# Altium PCB bms_schematic.PcbDoc
Units mil, origin at the board's own origin, x right, y up, seen from the top; angles counter-clockwise.
Board outline 6000 x 4000 mil, 2 copper layers (Top Layer, Bottom Layer); 49 components, 35 nets, 163 pads, 4 vias.
Unrouted connection lines stored in the file: 89.
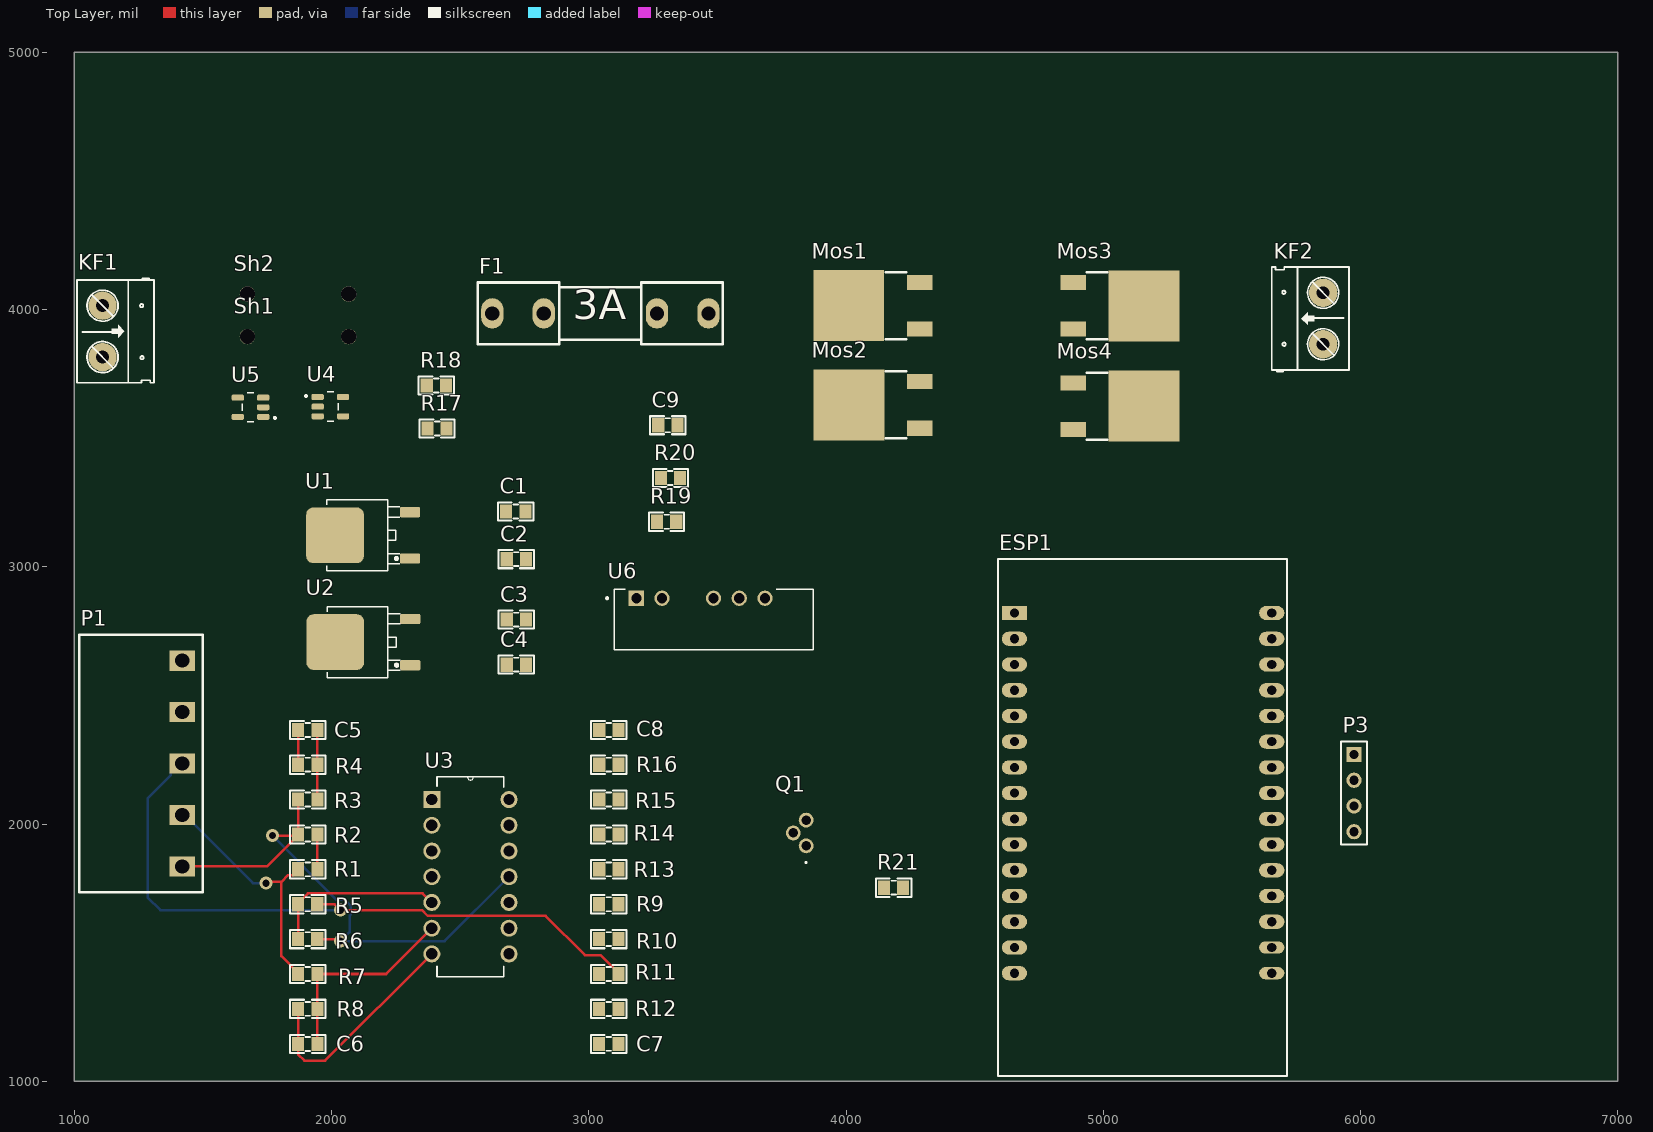
[diagram p0: Top Layer view]
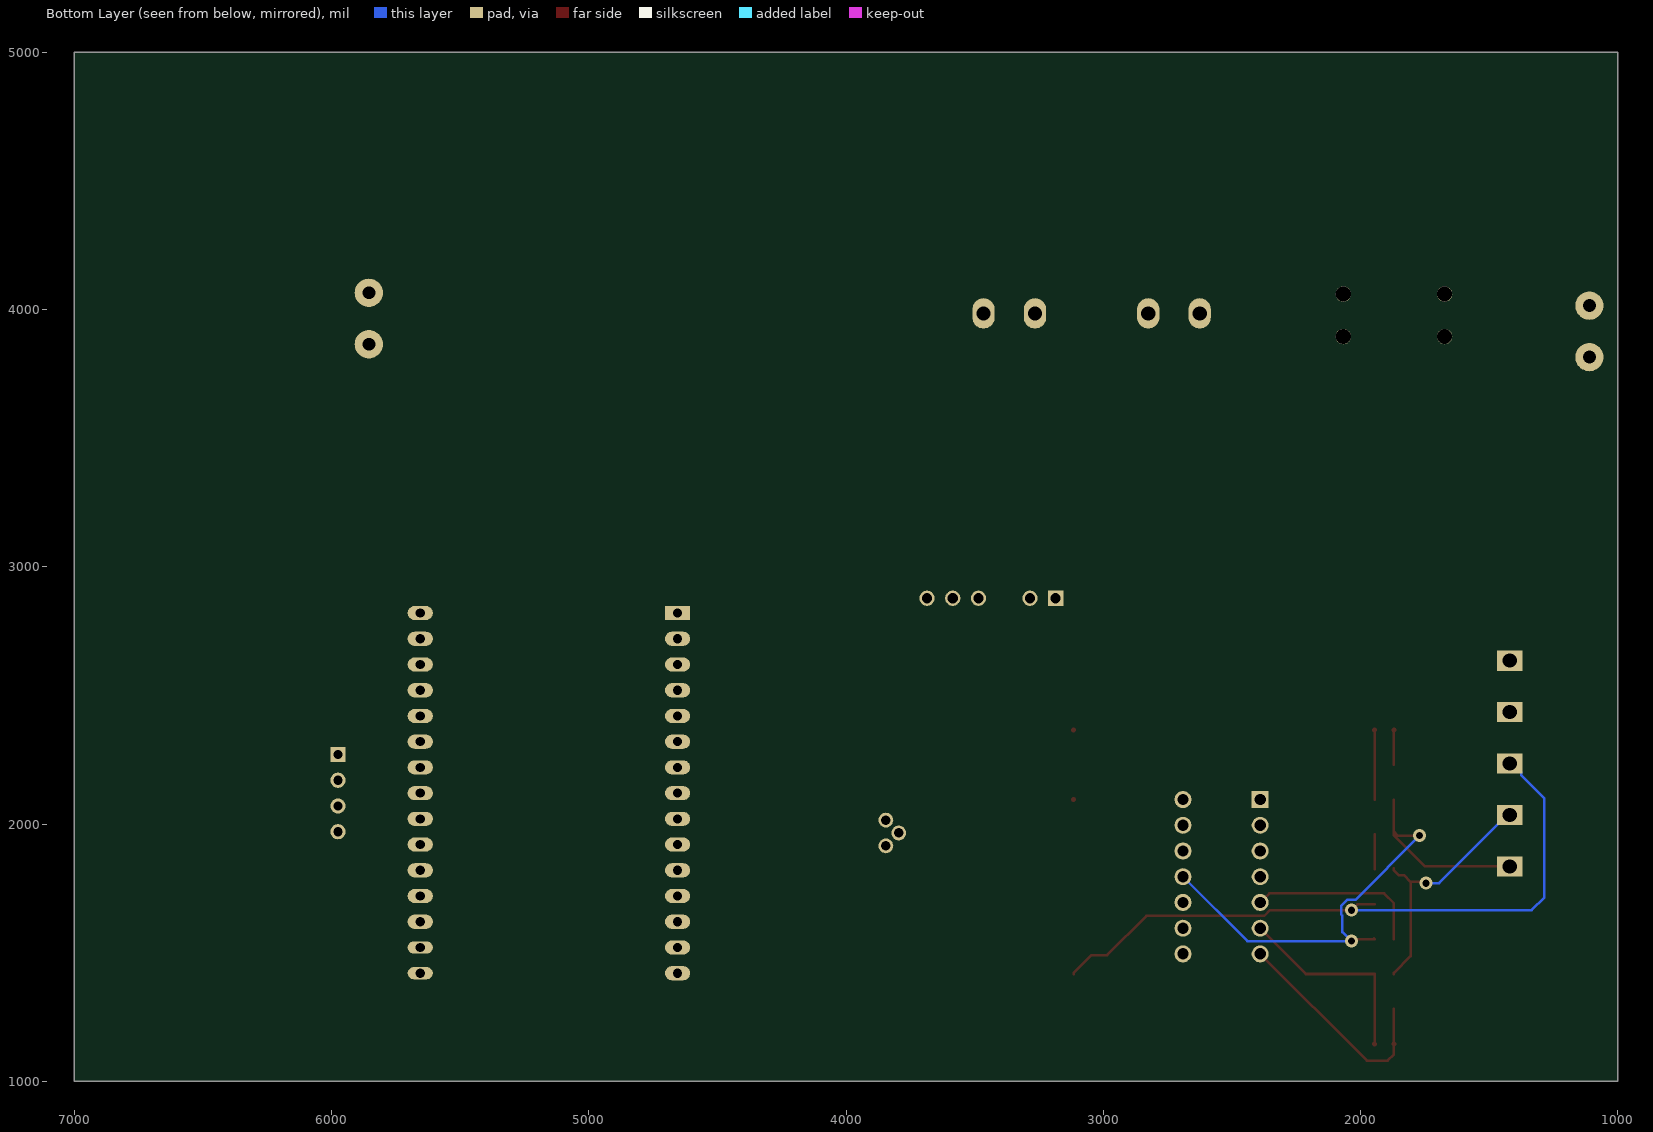
[diagram p1: Bottom Layer view, seen from below]

## Layer stack, top to bottom
Top Solder: solder mask 0.4, Solder Resist, Dk 3.5
Top Layer: signal copper 1.4
Dielectric 1: dielectric 12.6, FR-4, Dk 4.8
Bottom Layer: signal copper 1.4
Bottom Solder: solder mask 0.4, Solder Resist, Dk 3.5

## Board outline
1000,1000 7000,1000 7000,5000 1000,5000

## Design rules (kind name [scope] priority, off if disabled: settings)
Clearance [All] p1: gap=10 ignorepadtopadclearanceinfootprint=FALSE except(0: Arc-Hole Track-Hole SMDPad-Hole THPad-Hole Via-Hole Fill-Hole Poly-Hole Region-Hole Text-Hole)
PolygonConnect [All] p1: connectstyle=Relief reliefconductorwidth=10 reliefentries=4 polygonreliefangle="90 Angle" airgapwidth=10
RoomDefinition bms_schematic [InComponentClass('bms_schematic')] p1: confinementstyle=ConfineIn formatcopy=TRUE lockcomponents=FALSE outline 7590,885 20875,885 20875,3015 7590,3015
RoutingVias [All] p1: holewidth=28 width=50 viastyle="Through Hole" minholewidth=28 minwidth=50 maxholewidth=28 maxwidth=50
SolderMaskExpansion [All] p1: expansion=4 istentingtop=FALSE
Width [All] p1: maxlimit=60 minlimit=10 preferedwidth=10
30 further rules are at their usual default settings.

## Classes and differential pairs
component class bms_schematic: C1 C2 C3 C4 C5 C6 C7 C8 C9 ESP1 F1 KF1 KF2 Mos1 Mos2 Mos3 Mos4 P1 P3 Q1 R4 R9 R10 R11 R12 R13 R14 R15 R16 R17 R18 R19 R20 R21 Sh1 Sh2 U1 U2 U3 U4 U5 U6

## Components (designator, comment, footprint, x,y, rotation, side; value= is the part's Value field where it differs from the comment)
C1 "100nF (0.1uF)" "tu 0805" 2716.21,3214.4 r180 top
C2 "330nF (0.33uF)" "tu 0805" 2718.78,3029.27 r180 top
C3 "100nF (0.1uF)" "tu 0805" 2718.98,2794.27 r180 top
C4 "330nF (0.33uF)" "tu 0805" 2718.78,2619.27 r180 top
C5 "100nF" "tu 0805" 1907.53,2365.61 r0 top
C6 "100nF" "tu 0805" 1907.53,1145.13 r0 top
C7 "100nF" "tu 0805" 3077.87,1145.13 r180 top
C8 "100nF" "tu 0805" 3077.87,2365.61 r0 top
C9 "474" "tu 0805" 3307.23,3550.13 r0 top
ESP1 "ESP32 DEVKIT" "ESP32 WROOM 32 KIT" 4655,2820 r0 top
F1 "" FUSE_3A_HOLDER 3045.13,3985 r0 top
KF1 "IN+" "Con 2 KF301 5.08" 1110,4015 r270 top
KF2 "OUT+" "Con 2 KF301 5.08" 5855,3865 r90 top
Mos1 "AOD403" TO-252-3 4068.41,4014.95 r90 top
Mos2 "AOD403" TO-252-3 4069,3629.4 r90 top
Mos3 "AOD403" TO-252-3 5101.21,4014.4 r270 top
Mos4 "AOD403" TO-252-3 5101.21,3624.4 r270 top
P1 "CON 5 EDG5.08" "CON 5 5EDG5.08" 1420,1835 r90 top
P3 "Header 4P" HDR1X4 5975,2270 r270 top
Q1 "S8050" S8050 3845,1915 r90 top
R1 "100k" "tro smd 0805" 1907.43,1826.17 r0 top
R2 "75k" "tro SMD 0805" 1907.43,1961.78 r0 top
R3 "100k" "tro smd 0805" 1907.43,2097.39 r0 top
R4 "75k" "tro SMD 0805" 1907.43,2233 r0 top
R5 "100k" "tro smd 0805" 1907.43,1685.57 r180 top
R6 "75k" "tro SMD 0805" 1907.43,1549.96 r180 top
R7 "100k" "tro smd 0805" 1907.43,1419.35 r0 top
R8 "75k" "tro SMD 0805" 1907.43,1283.74 r0 top
R9 "100k" "tro smd 0805" 3077.77,1685.57 r180 top
R10 "75k" "tro SMD 0805" 3077.77,1549.96 r180 top
R11 "100k" "tro smd 0805" 3077.77,1414.35 r180 top
R12 "75k" "tro SMD 0805" 3077.77,1278.74 r180 top
R13 "100k" "tro smd 0805" 3077.77,1826.17 r0 top
R14 "75k" "tro SMD 0805" 3077.77,1961.78 r0 top
R15 "100k" "tro smd 0805" 3077.77,2097.39 r0 top
R16 "75k" "tro SMD 0805" 3077.77,2233 r0 top
R17 "390k" "Tro SMD 0805" 2410,3540 r0 top
R18 "390k" "Tro SMD 0805" 2407.23,3707.39 r0 top
R19 "100k" "tro smd 0805" 3302.23,3177.39 r0 top
R20 "10R" "tro smd 0805" 3317.77,3342.61 r180 top
R21 "300R" "Tro SMD 0805" 4185,1750 r180 top
Sh1 "Shunt" Shunt 1870,3895 r0 top
Sh2 "Shunt" Shunt 1870,4060 r0 top
U1 "78M05 SMD TO252" TO252 2159.45,3122.2 r90 top
U2 "78M9" TO252 2160.12,2707.2 r90 top
U3 "LM348N" DIP254P762X508-14 2690,1495 r0 top
U4 "INA138NA/3K" SOT95P280X145-5N 1995.59,3622.4 r0 top
U5 "INA138NA/3K" SOT95P280X145-5N 1685,3620 r180 top
U6 "A0512S-1WR3" CONV_A0512S-1WR3 3485,2795 r0 top

## Footprints (in the part's own frame and the unit in brackets; to place one, negate y for a bottom-side part, rotate by r counter-clockwise, add the part's x,y. Pads: shape width x height; smd on the part's side, far side on the other; paste and mask are expansions set on the pad)
"Con 2 KF301 5.08" [mil]
  round 110 hole 50: 1(0,0) 2(200,0)
  silkscreen extent -106,-100 300,200, body extent -45,-97 255,190, height 335
"CON 5 5EDG5.08" [mm]
  rect 2x2.5 hole 1.4: 1(0,0) 2(5.08,0) 3(10.16,0) 4(15.24,0) 5(20.32,0)
  silkscreen extent -2.54,-2.03 22.86,10.16, body extent -2.5,-1.75 22.82,10.25, height 3.15
CONV_A0512S-1WR3 [mm]
  rect 1.508x1.508 hole 1: 1(-7.62,2.1)
  round 1.508 hole 1: 2(-5.08,2.1) 4(0,2.1) 5(2.54,2.1) 6(5.08,2.1)
  silkscreen extent -10.6,-3 9.82,3, body extent -9.82,-3 9.82,3, height 10.16
DIP254P762X508-14 [mil]
  rect 66x66 hole 44: 1(-300,600)
  round 66 hole 44: 2(-300,500) 3(-300,400) 4(-300,300) 5(-300,200) 6(-300,100) 7(-300,0) 8(0,0) 9(0,100) 10(0,200) 11(0,300) 12(0,400) 13(0,500) 14(0,600)
  silkscreen extent -280,-88 -20,688
"ESP32 WROOM 32 KIT" [mm]
  rect 2.5x1.397 hole 0.9: 1(0,0)
  oval 2.5x1.397 hole 0.9: 2(0,-2.54) 3(0,-5.08) 4(0,-7.62) 5(0,-10.16) 6(0,-12.7) 7(0,-15.24) 8(0,-17.78) 9(0,-20.32) 10(0,-22.86) 11(0,-25.4) 12(0,-27.94) 13(0,-30.48) 14(0,-33.02) 15(0,-35.56) 18(25.4,-30.48) 19(25.4,-27.94) 20(25.4,-25.4) 21(25.4,-22.86) 22(25.4,-20.32) 23(25.4,-17.78) 24(25.4,-15.24) 25(25.4,-12.7) 26(25.4,-10.16) 27(25.4,-7.62) 28(25.4,-5.08) 29(25.4,-2.54) 30(25.4,0)
  oval 2.5x1.2 hole 0.9: 16(25.4,-35.56) 17(25.4,-33.02)
  silkscreen extent -1.65,-45.72 26.92,5.33, body extent -1.55,-45.47 26.95,5.46, height 10.49
FUSE_3A_HOLDER [mm]
  oval 2.2x3 hole 1.4: 1(-10.671,0) 1(-5.591,0) 2(5.591,0) 2(10.671,0)
  silkscreen extent -12.1,-3.05 12.1,3.05, body extent -10.83,-2.95 10.88,2.95, height 9.75
HDR1X4 [mm] "Connector; Header; 4 Position"
  rect 1.5x1.5 hole 0.9: 1(0,0)
  round 1.5 hole 0.9: 2(2.54,0) 3(5.08,0) 4(7.62,0)
  silkscreen extent -1.27,-1.27 8.89,1.27, body extent -1.27,-1.27 8.89,1.27, height 7
S8050 [mm]
  round 1.462 hole 0.94: 1(0,0) 2(1.272,1.267) 3(2.544,0)
  silkscreen extent -1.7,-0.05 -1.6,0.05, body extent -1.08,-1.34 3.62,2.34, height 4.89
Shunt [mil]
  round 60 hole 59.06: 1(-196.85,0) 2(196.85,0)
SOT95P280X145-5N [mm]
  rrect50% 1.21x0.59 smd: 1(-1.255,0.95) 2(-1.255,0) 3(-1.255,-0.95) 4(1.255,-0.95) 5(1.255,0.95)
  silkscreen extent -2.51,-1.45 0.8,1.45
TO252 [mm] "TO252"
  round 0.5 on Mech15: 0(0,0)
  rrect25% 1x2 smd: 1(-2.285,-3.7) 3(2.285,-3.7)
  rrect25% 5.5x5.7 smd: 2(0,3.7)
  silkscreen extent -3.5,-2.7 3.5,4.5, body extent -3.3,-3.95 3.3,5.76, height 2.31
TO-252-3 [mm]
  rect 1.5x2.5 smd: 1(-2.3,-5.532) 3(2.3,-5.532)
  rect 7x7 smd: 2(0,1.468)
  silkscreen extent -3.3,-4.19 3.3,-2.2, body extent -3.27,-5.81 3.27,4.13, height 2.41
"tro smd 0805" [mm]
  rect 1.2x1.4 smd: 1(-0.946,-0.061) 2(0.954,-0.061)
  silkscreen extent -1.75,-0.97 1.75,0.84, body extent -1.56,-0.76 1.44,0.64, height 0.53
"tro SMD 0805" [mm]
  rect 1.2x1.4 smd: 1(-0.946,-0.061) 2(0.954,-0.061)
  silkscreen extent -1.75,-0.97 1.75,0.84, body extent -1.56,-0.76 1.44,0.64, height 0.53
"Tro SMD 0805" [mm]
  rect 1.2x1.4 smd: 1(-0.946,-0.061) 2(0.954,-0.061)
  silkscreen extent -1.75,-0.97 1.75,0.84, body extent -1.56,-0.76 1.44,0.64, height 0.53
"tu 0805" [mm] "Compoment SMD 80x50mil"
  rect 1.2x1.4 smd: 1(-0.946,-0.003) 2(0.954,-0.003)
  silkscreen extent -1.75,-0.89 1.75,0.89, body extent -1.01,-0.64 1.01,0.63, height 0.61

## Part data
C1 C2 C3 C4 C5 C6 C7 C8: library part "Tu 0805 331 50V 10%", "Dán", Chung_Loai=Dán, Don_Vi=Con, Ma_Hang=MH004562, So_Chan=2, Ten_Linh_Kien="Tụ 0805 331-330P 10% 50V"
C9: library part "Tu 0805 474 50V 10%", "Dán", Chung_Loai=Dán, Don_Vi=Con, Ma_Hang=MH006116, So_Chan=2, Ten_Linh_Kien="Tụ 0805 474-470nF 50V 10%"
ESP1: library part "ESP32 WROOM 32 KIT"
F1: library part FUSE_PbWire, "PB wire fuse", CompanyID=VT-xxxx, Solder=SMT
KF1 KF2: library part "CON 2 KF301", "Cắm", Chung_Loai=Cắm, Don_Vi=Con, Ma_Hang=MH000987, Ten_Linh_Kien="CON 2 KF301-2P 5.08MM Xanh Dương"
P1: "Cắm", Chung_Loai=Cắm, Don_Vi=Con, Ma_Hang=MH003589, Ten_Linh_Kien="CON 5 2EDG5.08-5P 5.08MM ( Xanh Cong)"
P3: library part "Header 4x1", "Header, 4 Pin Pitch 2.54mm", MPN=S1012EC-40-ND, CompanyID=VT-00125, Solder=WAVE
Q1: "Transistor BJT NPN", Manufacturer_Name=MCC, Datasheet Link=https://datasheet.datasheetarchive.com/originals/distributors/Datasheets-316/603661.pdf, Height=4.7mm, Manufacturer_Part_Number=S8050
R1 R3 R5 R7 R9 R11 R13 R15 R19: library part "Tro 0805 5% 100k", "Dán", Chung_Loai=Dán, Don_Vi=Con, Ma_Hang=MH005250, So_Chan=2, Ten_Linh_Kien="Trở 0805 5% 100k"
R2 R4 R6 R8 R10 R12 R14 R16: library part "Tro 0805 5% 75k", "Dán", Chung_Loai=Dán, Don_Vi=Con, Ma_Hang=MH005327, So_Chan=2, Ten_Linh_Kien="Trở 0805 5% 75k"
R17 R18: library part "Tro 0805 5% 390k", "Dán", Chung_Loai=Dán, Don_Vi=Con, Ma_Hang=MH005338, So_Chan=2, Ten_Linh_Kien="Trở 0805 5% 390k"
R20: library part "Tro 0805 5% 10R", "Dán", Chung_Loai=Dán, Don_Vi=Con, Ma_Hang=MH005240, So_Chan=2, Ten_Linh_Kien="Trở 0805 5% 10R"
R21: library part "Tro 0805 5% 300R", "Dán", Chung_Loai=Dán, Don_Vi=Con, Ma_Hang=MH005335, So_Chan=2, Ten_Linh_Kien="Trở 0805 5% 300R"
U1: "Dán", Chung_Loai=Dán, Don_Vi=Con, Ma_Hang=MH001917, Ten_Linh_Kien="78M05 TO252"
U2: library part "78M09 SMD TO252", "Dán", Chung_Loai=Dán, Don_Vi=Con, Ma_Hang=MH004847, Ten_Linh_Kien="78M09 TO252"
U3: "General Purpose Amplifier 4 Circuit 14-DIP", Package="DIP-14 Raytheon", Availability=Unavailable, DigiKey-Purchase-URL=https://snapeda.com/shop?store=DigiKey&id=2765155, MF=STMicroelectronics, MP=LM348N, Price=None, SnapEDA_Link=https://www.snapeda.com/parts/LM348N/STMicroelectronics/view-part/2765155/?ref=snap
U4 U5: "2.7 to 36V, 800kHz Variable gain current sense amplifier 5-SOT-23 -40 to 125", Package="SOT-23-5 Texas Instruments", Arrow_Electronics-Purchase-URL=https://snapeda.com/shop?store=Arrow+Electronics&id=11314, Availability=Good, BuyPart=https://www.snapeda.com/parts/INA138NA/3K/Texas%20Instruments/view-part/11314/?ref=eda, DigiKey-Purchase-URL=https://snapeda.com/shop?store=DigiKey&id=11314, MF="Texas Instruments", Mouser-Purchase-URL=https://snapeda.com/shop?store=Mouser&id=11314, MP=INA138NA/3K, Price=None, SnapEDA_Link=https://www.snapeda.com/parts/INA138NA/3K/Texas%20Instruments/view-part/11314/?ref=snap, Texas_Instruments-Purchase-URL=https://snapeda.com/shop?store=Texas+Instruments&id=11314
U6: "Isolated Module DC DC Converter 2 Output 12V -12V 42mA, 42mA 4.5V - 5.5V Input", Package="SIP-5-5 MORNSUN", Availability="In Stock", Check_prices=https://www.snapeda.com/parts/A0512S-1WR3/MORNSUN/view-part/5823749/?ref=eda, MF="Mornsun America, LLC", MP=A0512S-1WR3, Price=None, Purchase-URL=https://pricing.snapeda.com/search/part/A0512S-1WR3/?ref=eda, SnapEDA_Link=https://www.snapeda.com/parts/A0512S-1WR3/MORNSUN/view-part/5823749/?ref=snap

## Via types
v1: diameter 50, hole 28, Top Layer to Bottom Layer, 4 vias

## Nets (pads, with @x,y where several pads share a name; then routed paths per layer and width w, separated by ;. In a path a pad name is that pad's centre, name@x,y a point inside that pad or via, vN(x,y) a via of type N, cw(c..) or ccw(c..) an arc to the next point about the centre after c; other vN are vias at no path point)
Cell1Neg: C1.1 C2.1 C3.1 C4.1 ESP1.14 P1.1 Q1.1 R2.1 R3.1 R6.1 R10.1 R14.1 R17.2 R18.2 U1.2 U2.2 U3.11 U4.2 U5.2 | length 2173.1
  Top Layer w10: P1.1 1749.75,1835 1870.2,1955.45 R2.1 R2.1@1870.2,1970 ; v1(1770,1955) 1855.2,1955 R2.1@1870.2,1970 ; R3.1 R2.1@1870.2,1970 ; R6.1@1947.3,1555 R6.1 2027.65,1552.35 v1(2035,1545)
  Bottom Layer w10: v1(1770,1955) 2020,1705 2051.57,1705 2075,1681.57 2075,1648.43 2070,1643.43 2070,1580 v1(2035,1545) 2440,1545 U3.11
Cell1Pos: P1.2 R1.1 R7.1 | length 983.4
  Top Layer w10: P1.2 P1.2@1429.84,2035 ; v1(1745,1770) 1750,1775 1805,1775 ; R7.1 1870.2,1420.89 1805,1486.09 1805,1775 ; R1.1@1870.2,1827.72 R1.1 1870.2,1819.84 1851.57,1801.22 1831.22,1801.22 1805,1775
  Bottom Layer w10: P1.2 1429.84,2035 1694.84,1770 v1(1745,1770)
Cell1Vol: C5.1 ESP1.5 R4.1 U3.1 | length 135.6
  Top Layer w10: R4.1 1870.3,2230.71 C5.1
  Top Layer w20: C5.1@1869.83,2365 C5.1
Cell2Pos: P1.3 R5.1 R11.1 | length 2637.7
  Top Layer w10: R5.1 2012.04,1687.96 v1(2035,1665) 2035.4,1665.4 2351.72,1665.4 2374.12,1643 2832,1643 2985,1490 3045.68,1490 3115,1420.68 R11.1
  Bottom Layer w10: P1.3 1410.16,2235 1375.79,2200.63 1375.79,2190.79 1285,2100 1285,1715 1335,1665 v1(2035,1665)
Cell2Vol: C6.1 ESP1.4 R8.1 U3.7 | length 878.5
  Top Layer w10: R8.1 1870.2,1145.1 C6.1@1870.25,1145.05 ; C6.1 1870.3,1104.7 1895,1080 1975,1080 U3.7
  Top Layer w20: C6.1@1870.25,1145.05 C6.1
Cell3Pos: P1.4 R9.1 R15.1
Cell3Vol: C7.1 ESP1.3 R12.1 U3.8
Cell4Pos: P1.5 R13.1 Sh1.1 Sh2.1 U4.3 U5.4
Cell4Vol: C8.1 ESP1.2 R16.1 U3.14
ChargeCurr: ESP1.6 R17.1 U4.1
Comm1Rx: ESP1.27 P3.2
Comm1Tx: ESP1.28 P3.1
Comm2Rx: ESP1.21 P3.4
Comm2Tx: ESP1.22 P3.3
DischargeCurr: ESP1.7 R18.1 U5.1
FetControl: ESP1.8 R21.1
FuseMos: F1.2 Mos1.2 Mos2.2
InPos: KF1.1 KF1.2
NetC5_2: C5.2 R3.2 R4.2 U3.2 | length 270.6
  Top Layer w10: R3.2 1945.1,2095.1 C5.2
  Top Layer w20: C5.2@1945.05,2365.42 C5.2
NetC6_2: C6.2 R7.2 R8.2 U3.6 | length 790.8
  Top Layer w10: C6.2 1945.1,1416.85 R7.2 2211.96,1416.96 U3.6
  Top Layer w20: C6.2@1945.05,1145.05 C6.2
NetC7_2: C7.2 R11.2 R12.2 U3.9
NetC8_2: C8.2 R15.2 R16.2 U3.13 | length 0.1
  Top Layer w20: R15.2 R15.2@3115.4,2095.05 ; C8.2@3115.4,2365.42 C8.2
NetC9_1: C9.1 Mos1.3 Mos2.3 Mos3.3 Mos4.3 R19.2 U6.6
NetC9_2: C9.2 Mos1.1 Mos2.1 Mos3.1 Mos4.1 R19.1 R20.2
NetQ1_2: Q1.2 R21.2
NetQ1_3: Q1.3 U6.2
NetR1_2: R1.2 R2.2 U3.3 | length 135.6
  Top Layer w10: R1.2 R2.2
NetR5_2: R5.2 R6.2 U3.5 | length 690.4
  Top Layer w10: R6.2 R5.2 1869.85,1691.9 1908.47,1730.52 2354.48,1730.52 U3.5
NetR9_2: R9.2 R10.2 U3.10
NetR13_2: R13.2 R14.2 U3.12
NetR20_1: R20.1 U6.5
OutPos: KF2.1 KF2.2 Mos3.2 Mos4.2
RegVol5: C1.2 ESP1.15 U1.3 U6.1
RegVol9: C3.2 U2.3 U3.4 U4.5 U5.5
Shunt-: C2.2 C4.2 F1.1 Sh1.2 Sh2.2 U1.1 U2.1 U4.4 U5.3
pads on no net: ESP1.1 ESP1.9 ESP1.10 ESP1.11 ESP1.12 ESP1.13 ESP1.16 ESP1.17 ESP1.18 ESP1.19 ESP1.20 ESP1.23 ESP1.24 ESP1.25 ESP1.26 ESP1.29 ESP1.30 U1.0 U2.0 U6.4

## Text inside footprints (layer, text, board x,y; h text height)
F1: Top Overlay "3A" at 2937.63,3924 h196.85